# Altium PCB uCurrentRev5.PcbDoc
Units mil, origin at the board's own origin, x right, y up, seen from the top; angles counter-clockwise.
Board outline 1968.5 x 3110.24 mil, 2 copper layers (Top Layer, Bottom Layer); 31 components, 22 nets, 89 pads, 4 vias.
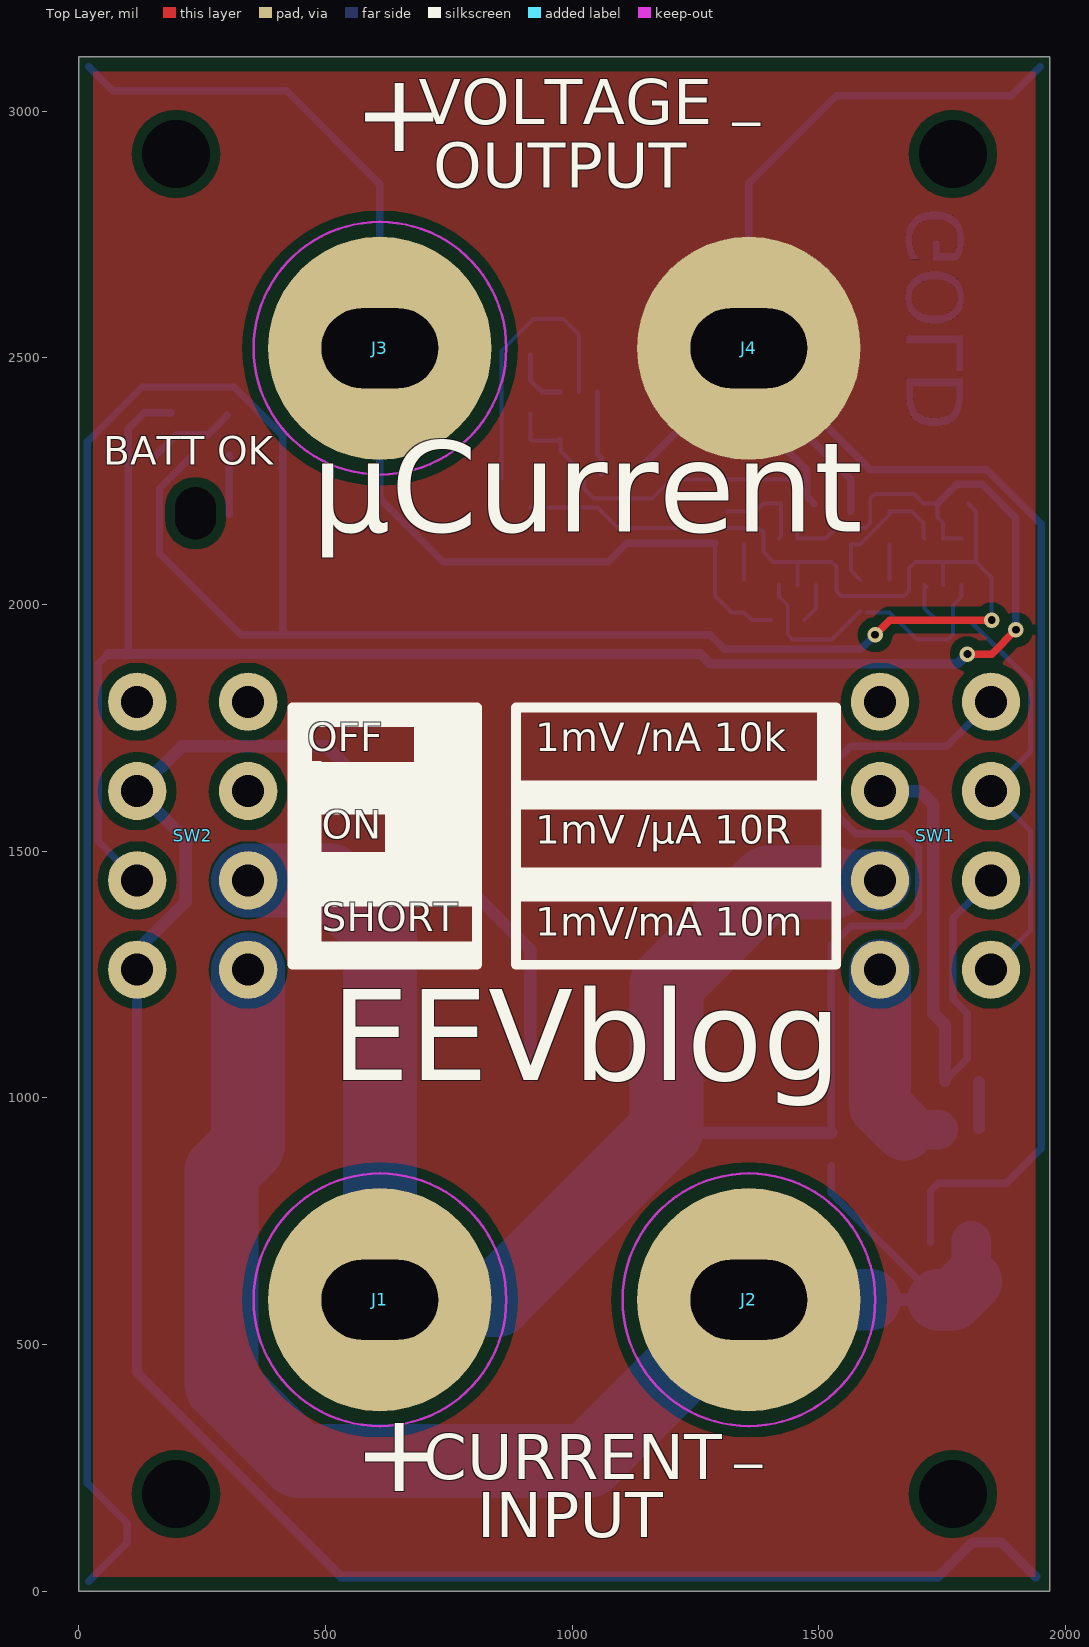
[diagram p0: Top Layer view]
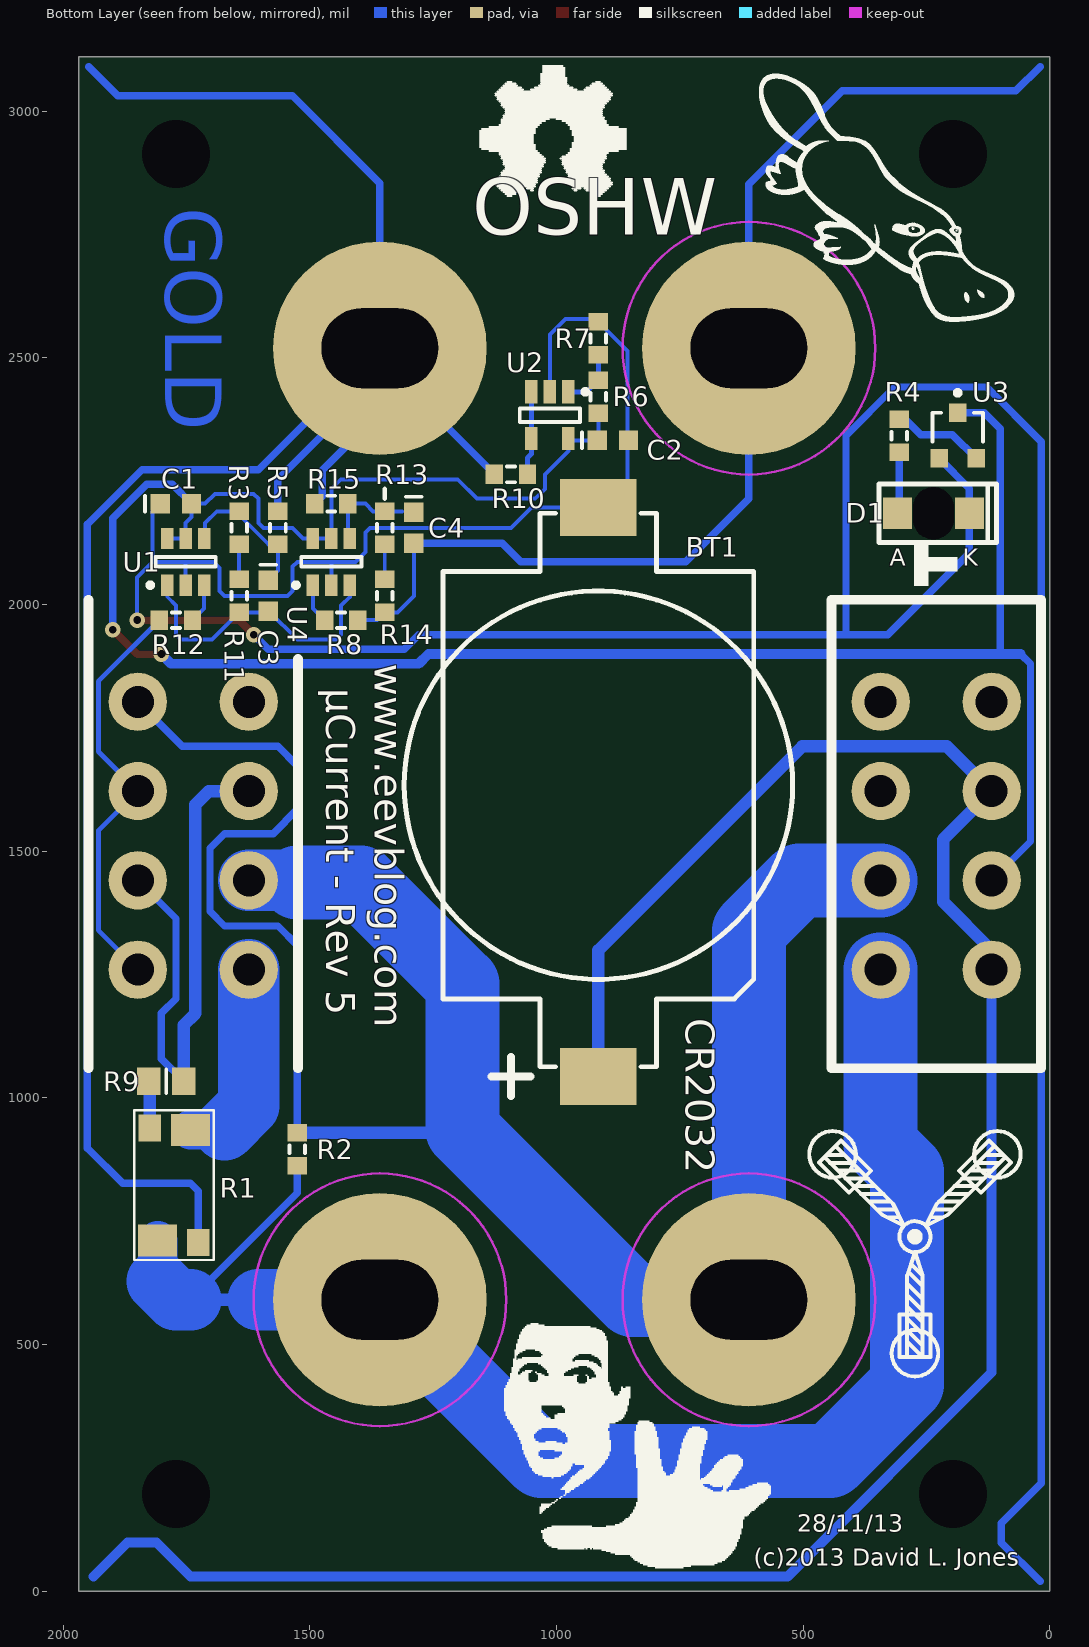
[diagram p1: Bottom Layer view, seen from below]

## Layer stack, top to bottom
Top Layer: signal copper 1.4
Dielectric: dielectric 12.6, FR-4, Dk 4.8
Bottom Layer: signal copper 1.4

## Board outline
0,0 1968.5,0 1968.5,3110.24 0,3110.24

## Design rules (kind name [scope] priority, off if disabled: settings)
Clearance Clearance_3 [InNamedPolygon('Top Layer-No Net')] p1: gap=20
Clearance Clearance_2 [InNamedPolygon('Top Layer-No Net')] p2: gap=10
Clearance Clearance_1 [InNamedPolygon('Top Layer-No Net')] p3: gap=20
Clearance [All] p4: gap=25
FabricationTestPointUsage TestPointUsage [All] p1: valid=0 allowmultiple=FALSE
FabricationTestpoint Testpoint [All] p1: side=3 testpointundercomponent=TRUE minsize=40 maxsize=100 preferedsize=60 minholesize=0 maxholesize=40 preferedholesize=32 testpointgrid=1 allowsidetop=TRUE allowsidebottom=TRUE usegrid=TRUE gridtolerance=0.01
HoleSize [All] p1: absolutevalues=TRUE maxlimit=196.85 minlimit=1 maxpercent=80.000 minpercent=20.000
PolygonConnect [All] p1: connectstyle=Direct reliefconductorwidth=10 reliefentries=4 polygonreliefangle="90 Angle"
RoutingVias [All] p1: holewidth=15.75 width=31.5 viastyle="Through Hole" minholewidth=15.75 minwidth=31.5 maxholewidth=15.75 maxwidth=31.5
SilkscreenOverComponentPads [All] p1: minsilkscreentomaskgap=10
SolderMaskExpansion [All] p1: expansion=2
Width [All] p1: maxlimit=150 minlimit=8 preferedwidth=15 minimp=50.000000 maximp=50.000000 favimp=50.000000
24 further rules are at their usual default settings.

## Components (designator, comment, footprint, x,y, rotation, side; value= is the part's Value field where it differs from the comment)
BT1 "2032 3V Lithium battery" "2032 SMD Holder" 915.35,1043.31 r90 bottom
C1 "0u1 6V" CAPC1608N 1771.65,2204.72 r180 bottom
C2 "0u1 16V" CAPC1608N 885.83,2332.68 r180 bottom
C3 "10pF" CAPC1608N 1584.65,2017.72 r270 bottom
C4 "10pF" CAPC1608N 1289.37,2155.51 r270 bottom
D1 "GREEN" 1206reverseLED 236.22,2185.04 r0 bottom
J1 "4mm Socket" PIN1 610.24,590.55 r0 top locked
J2 "4mm Socket" PIN1 1358.27,590.55 r0 top locked
J3 "4mm Socket" PIN1 610.24,2519.68 r0 top locked
J4 "4mm Socket" PIN1 1358.27,2519.68 r0 top locked
R1 "0R01 0.1%" 2512shuntresistor 1742.13,935.04 r0 bottom
R2 "10K 0.05%" RESC1608N 1525.59,895.67 r270 bottom
R3 "6K8 0.05%" RESC1608N 1643.7,2155.51 r270 bottom
R4 "270R" RESC1608N 305.12,2342.52 r90 bottom
R5 "1K 0.05%" RESC1608N 1564.96,2155.51 r90 bottom
R6 "100K 1%" RESC1608N 915.35,2421.26 r270 bottom
R7 "100K 1%" RESC1608N 915.35,2539.37 r90 bottom
R8 "270R" RESC1608N 1437.01,1968.5 r0 bottom
R9 "10R 0.05%" RESC2012N 1791.34,1033.46 r0 bottom
R10 "270R" RESC1608N 1092.52,2263.78 r180 bottom
R11 "2K2 0.05%" RESC1608N 1643.7,2017.72 r270 bottom
R12 "270R" RESC1608N 1771.65,1968.5 r180 bottom
R13 "6K8 0.05%" RESC1608N 1348.43,2155.51 r270 bottom
R14 "2K2 0.05%" RESC1608N 1348.43,2017.72 r270 bottom
R15 "1K 0.05%" RESC1608N 1456.69,2204.72 r0 bottom
SW1 "SW-DT3T-NOCOMMON" SW_L203011MS02 1624.02,1259.84 r0 top locked
SW2 "SW-DT3T-NOCOMMON" SW_L203011MS02 118.11,1259.84 r0 top locked
U1 "MAX4239AUT" SOT-23-CH6_N 1751.97,2086.61 r90 bottom
U2 "LMV321AS5X" SOT23-5AL 1013.78,2383.86 r270 bottom
U3 "TPS3809L30DBVR" SOT23 187.01,2342.52 r180 bottom
U4 "MAX4239AUT" SOT-23-CH6_N 1456.69,2086.61 r90 bottom

## Footprints (in the part's own frame and the unit in brackets; to place one, negate y for a bottom-side part, rotate by r counter-clockwise, add the part's x,y. Pads: shape width x height; smd on the part's side, far side on the other; paste and mask are expansions set on the pad)
1206reverseLED [mm] "1206 Reverse LED SMD"
  round 0 hole 2.1 slot 2.7 at 90 deg unplated paste+2.032 mask+1.05: 0(0,0)
  rect 1.5x1.6 smd: 1(1.85,0) 2(-1.85,0)
  silkscreen extent -3.25,-1.5 2.8,1.5, body extent -1.6,-0.6 1.5,0.6, height 0.67
"2032 SMD Holder" [mil]
  rect 115x155 smd: 1(0,0) 2(1153.54,0)
  silkscreen extent -39,-394 1142,394
2512shuntresistor [mm]
  rect 2x1.65 smd mask+0.051: 1(0,0) 2(1.7,5.7)
  rect 1.15x1.4 smd mask+0.051: 3(2.1,-0.1) 4(-0.4,5.8)
  silkscreen extent -1.2,-1 2.9,6.7
CAPC1608N [mm] "Chip Capacitor, Body 1.6x0.8mm, IPC Medium Density"
  rect 1x1 smd: 1(-0.8,0) 2(0.8,0)
  silkscreen extent -1.6,-0.4 -1.6,0.4, body extent -0.87,-0.48 0.87,0.48, height 0.85
PIN1 [mm] "Connector; Plug"
  round 11.5 / inner round 10 / far side round 11 hole 4.1 slot 6 at 0 deg mask+0: 1(0,0)
RESC1608N [mm] "Chip Resistor, Body 1.6x0.8mm, IPC Medium Density"
  rect 0.9x1 smd: 1(-0.85,0) 2(0.85,0)
  silkscreen extent -0.2,-0.4 0.2,0.4, body extent -0.85,-0.48 0.85,0.48, height 0.6
RESC2012N [mm] "Chip Resistor, Body 2.0x1.3mm, IPC Medium Density"
  rect 1.2x1.4 smd: 1(-0.9,0) 2(0.9,0)
  silkscreen extent 0,-0.6 0,0.6, body extent -1.07,-0.7 1.07,0.7, height 0.65
SOT23 [mm] "SOT-23; 3 Leads; Body 3.1 x 2.5 mm, inc. leads (LxW max), Alternate Lead Configuration"
  rect 0.9x0.95 smd: 1(0,1.175) 2(0.95,-1.175) 3(-0.95,-1.175)
  silkscreen extent -1.3,-0.3 1.3,2.32
SOT23-5AL [mm] "SOT23, 5-Leads, Body 2.9x1.6mm, Pitch 0.95mm, Lead Span 2.8mm, IPC High Density"
  rect 1.2x0.65 smd: 1(-1.2,0.95) 2(-1.2,0) 3(-1.2,-0.95) 4(1.2,-0.95) 5(1.2,0.95)
  silkscreen extent -1.32,-1.55 0.35,1.95, body extent -0.9,-1.55 0.9,1.55, height 1.45
SOT-23-CH6_N [mm] "SOT23, 6-Leads, Body 2.9x1.6mm, Pitch 0.95mm, Lead Span 2.7mm, IPC Medium Density"
  rect 1.1x0.65 smd: 1(-1.2,0.95) 2(-1.2,0) 3(-1.2,-0.95) 4(1.2,-0.95) 5(1.2,0) 6(1.2,0.95)
  silkscreen extent -1.32,-1.55 0.25,1.95, body extent -0.9,-1.55 0.9,1.55, height 1.45
SW_L203011MS02 [mm] "C&K L203011MS02 PCB Slide Switch"
  round 3 hole 1.65: 1A(0,0) 1B(5.715,0) 2A(0,4.597) 2B(5.715,4.597) 3A(0,9.195) 3B(5.715,9.195) 4A(0,13.792) 4B(5.715,13.792)

## Part data
BT1: library part D-302-0000, "Lithium Battery Holder for CR2032 3V Cell"
C1 C2 C3 C4: library part D-101-0085, "Capacitor, Ceramic, 4.7uF 10% 16V 0805 (2012) X7R"
D1: library part D-153-0003, "LED, Red 0805 (2012) HSMH-C170"
J1 J2 J3 J4: library part Socket, "Socket"
R1: library part 1206currentShunt, "1206 current shunt"
R2 R3 R4 R5 R6 R7 R8 R10 R11 R12 R13 R14 R15: library part D-100-0004, "Resistor, 75R 1% 0805 (2012)"
R9: library part RES, "Resistor, 75R 1% 0805 (2012)"
U1 U4: library part MCP6273T-E/CH, "170 uA, 2 MHz Rail-to-Rail Operational Amplifier, 6-Pin SOT-23, Extended Temperature, Tape and Reel"
U2: library part LMV321, "2.7V GP Opamp"
U3: library part VoltageSupervisor

## Free pads (board coordinates)
  round 0 hole 137.8 unplated mask+78.74: 1(196.85,196.85) 2(1771.65,196.85) 3(196.85,2913.39) 4(1771.65,2913.39)

## Via types
v1: diameter 31.5, hole 15.75, Top Layer to Bottom Layer, tented both sides, 4 vias

## Nets (pads, with @x,y where several pads share a name; then routed paths per layer and width w, separated by ;. In a path a pad name is that pad's centre, name@x,y a point inside that pad or via, vN(x,y) a via of type N, cw(c..) or ccw(c..) an arc to the next point about the centre after c; other vN are vias at no path point)
+IN: J1.1 R2.1 SW1.2A SW1.4B SW2.2B | length 4314.3
  Bottom Layer w15: R2.1 1525.59,1309.06 1564.96,1348.43 1673.23,1348.43 1702.76,1377.95 1702.76,1505.91 1673.23,1535.43 1574.8,1535.43 1525.59,1584.65 1525.59,1673.23 1564.96,1712.6 1758.77,1712.6 SW1.4B
  Bottom Layer w25: 1196.85,929.13 R2.1
  Bottom Layer w125: 1525.59,1437.01 1529.43,1440.84 SW1.2A
  Bottom Layer w150: SW2.2B 507.98,1440.84 610.24,1338.58 J1.1 846.46,590.55 1190.94,935.04 1190.94,1230.32 1397.64,1437.01 1525.59,1437.01
+V: C1.2 C2.1 R6.2 SW2.2A U1.5 U1.6 U2.5 U3.1 U4.5 U4.6 | length 4637.2
  Top Layer w15: v1(1801.18,1899.61) 1850.39,1899.61 v1(1899.61,1948.82)
  Bottom Layer w8: C2.1@915.35,2334.65 R6.2 ; C2.1 972.44,2332.68 U2.5 976.38,2311.02 1023.62,2263.78 1023.62,2234.25 1043.31,2214.57 1161.42,2214.57 1200.79,2253.94 1437.01,2253.94 1456.69,2234.25 U4.5 U4.6 1513.78,2133.86 1535.43,2155.51 1594.49,2155.51 1604.33,2165.35 1604.33,2214.57 1614.17,2224.41 1692.91,2224.41 1712.6,2204.72 C1.2 1740.16,2177.17 1751.97,2165.35 U1.5 U1.6
  Bottom Layer w15: 59.06,1899.61 39.37,1879.92 39.37,1519.58 SW2.2A ; 100.39,1899.61 100.39,2356.3 132.87,2388.78 U3.1 ; C1.2 1779.53,2244.09 1830.71,2244.09 1899.61,2175.2 v1(1899.61,1948.82)
  Bottom Layer w20: 59.06,1899.61 1259.84,1899.61 1279.53,1879.92 1781.5,1879.92 v1(1801.18,1899.61)
-IN: J2.1 R1.2 R2.2 SW2.1B | length 3189.8
  Bottom Layer w15: R2.2 1525.59,807.09 1742.13,590.55
  Bottom Layer w25: 1604.33,590.55 1742.13,590.55
  Bottom Layer w80: J2.1@1210.63,590.55 J2.1 ; 1809.06,627.95 R1.2
  Bottom Layer w125: J2.1 1604.33,590.55 ; 1742.13,590.55 1771.65,590.55 1809.06,627.95
  Bottom Layer w150: SW2.1B 343.11,904.13 289.37,850.39 289.37,419.29 445.34,263.32 1031.04,263.32 J2.1
-V: BT1.2 C1.1 C2.2 D1.2 R7.2 U1.2 U2.2 U3.3 U4.2 | length 7279.3
  Top Layer w15: v1(1614.17,1938.98) 1643.7,1968.5 v1(1850.39,1968.5)
  Bottom Layer w8: 856.3,2255.91 856.3,2513.78 R7.2 921.26,2578.74 982.28,2578.74 1013.78,2547.24 U2.2 ; BT1.2 1051.18,2196.85 1092.52,2155.51 1377.95,2155.51 1387.8,2145.67 1387.8,2106.3 1407.48,2086.61 1525.59,2086.61 1535.43,2076.77 1535.43,2027.56 1545.28,2017.72 1673.23,2017.72 1683.07,2027.56 1683.07,2073.71 1695.97,2086.61 1751.97,2086.61 ; U4.2 1456.69,2086.61 ; U1.2 1751.97,2086.61 ; C1.1 1818.9,2188.98 1818.9,2086.61 ; v1(1850.39,1968.5) 1850.39,2055.12 1818.9,2086.61 ; 1751.97,2086.61 1818.9,2086.61
  Bottom Layer w15: 19.68,19.69 98.43,98.43 98.43,137.8 17.37,218.85 17.37,2330.36 127.95,2440.94 314.96,2440.94 413.39,2342.52 413.39,1938.98 ; U3.3 163.39,2235.24 D1.2 163.39,2104.33 328.74,1938.98 413.39,1938.98 ; v1(1614.17,1938.98) 1584.65,1909.45 1309.06,1909.45 1279.53,1938.98 413.39,1938.98
B+: BT1.1 SW2.1A SW2.3A | length 4571.6
  Bottom Layer w20: SW2.1A 118.11,442.91 531.5,29.53 1742.13,29.53 1811.02,98.43 1870.08,98.43 1938.98,29.53
  Bottom Layer w25: SW2.1A 118.11,1299.21 216.54,1397.64 216.54,1523.42 SW2.3A 208.87,1712.6 501.97,1712.6 915.35,1299.21 BT1.1
NetC3_1: C3.1 R3.1 R5.1 U1.4 | length 302.5
  Bottom Layer w8: C3.1 1564.96,2068.9 R5.1 1583.65,2122.05 1643.7,2182.1 R3.1 1688.98,2188.98 1712.6,2165.35 1712.6,2135.83 U1.4
NetC3_2: C3.2 R11.2 U1.1 U4.3 | length 592.9
  Bottom Layer w8: U4.3 1419.29,2015.75 1437.01,1998.03 1437.01,1938.98 1446.85,1929.13 1525.59,1929.13 1582.68,1986.22 C3.2 ; C3.2@1596.46,1984.25 R11.2 1698.82,1929.13 1761.81,1929.13 1771.65,1938.98 1771.65,1998.03 1789.37,2015.75 U1.1
NetC4_1: C4.1 R13.1 R15.1 U4.4 | length 189.3
  Bottom Layer w8: 1312.99,2188.98 R13.1 1372.05,2188.98 1387.8,2204.72 R15.1 1423.23,2137.8 U4.4
NetC4_2: C4.2 J3.1 R8.1 R14.2 | length 2315.3
  Bottom Layer w8: C4.2 1289.37,2017.72 1322.83,1984.25 R14.2 1364.17,1968.5 R8.1
  Bottom Layer w15: 19.68,3090.55 68.9,3041.34 420.96,3041.34 610.24,2852.06 J3.1 610.24,2214.57 738.19,2086.61 1072.83,2086.61 1110.24,2124.02 C4.2
NetD1_1: D1.1 R4.1 | length 120.1
  Bottom Layer w15: D1.1@305.12,2183.07 R4.1@305.12,2303.15
NetR1_1: R1.1 SW1.1A | length 414.1
  Bottom Layer w80: 1673.23,935.04 R1.1
  Bottom Layer w125: SW1.1A 1624.02,984.25 1673.23,935.04
NetR1_3: R1.3 R9.2 | length 92.5
  Bottom Layer w25: R1.3 R9.2@1824.8,1031.5
NetR3_2: R3.2 R11.1 | length 70.9
  Bottom Layer w8: R11.1 R3.2
NetR4_2: R4.2 U3.2 | length 187.9
  Bottom Layer w15: U3.2 197.83,2344.49 261.81,2344.49 R4.2@301.18,2383.86
NetR6_1: R6.1 R7.1 U2.1 | length 122
  Bottom Layer w10: R7.1 R6.1 938.98,2431.1 U2.1
NetR8_2: R8.2 U4.1 | length 80.7
  Bottom Layer w8: R8.2 1494.09,1992.13 U4.1
NetR9_1: R9.1 SW1.2B SW1.3A | length 1160
  Bottom Layer w15: R9.1 1755.91,1034.29 1801.18,1079.56 1801.18,1171.26 1771.65,1200.79 1771.65,1363.48 SW1.2B
  Bottom Layer w25: SW1.3A 1704.93,1621.84 1732.28,1594.49 1732.28,1171.26 1755.91,1147.64 R9.1@1755.91,1034.29
NetR10_2: R10.2 U2.3 U2.4 | length 170.6
  Bottom Layer w10: U2.3 U2.4 1051.18,2305.12 1059.06,2297.24 R10.2
NetR12_1: R12.1 SW1.1B SW1.3B | length 859.6
  Bottom Layer w10: R12.1 1929.13,1844.49 1929.13,1701.96 SW1.3B 1929.13,1541.72 1929.13,1339.96 SW1.1B
NetR12_2: R12.2 U1.3 | length 86.2
  Bottom Layer w8: U1.3@1718.5,2035.43 U1.3 1714.57,1992.13 R12.2
NetR13_2: R13.2 R14.1 | length 70.9
  Bottom Layer w8: R14.1 R13.2
VGND: J4.1 R1.4 R5.2 R10.1 R15.2 | length 5125.8
  Top Layer w15: J4.1@1190.95,2519.68 J4.1 ; J4.1@1358.27,2391.73 J4.1 ; J4.1@1358.27,2657.48 J4.1 ; J4.1@1545.28,2529.53 1535.43,2519.68 J4.1
  Bottom Layer w15: R10.1 J4.1@1358.27,2496.06 ; R15.2 1475.19,2219.69 1475.19,2272.44 1358.27,2389.36 J4.1@1358.27,2460.63 ; R5.2 1564.96,2253.94 J4.1@1358.27,2460.63 ; R1.4 1726.38,811.02 1742.13,826.77 1879.92,826.77 1951.13,897.98 1951.13,2163.04 1840.55,2273.62 1604.33,2273.62 1377.95,2500 1362.2,2500 J4.1@1358.27,2496.06 ; 1948.82,3090.55 1889.76,3031.5 1535.43,3031.5 1358.27,2854.33 J4.1 ; J4.1@1358.27,2460.63 J4.1@1358.27,2496.06 ; J4.1@1358.27,2460.63 J4.1 ; J4.1@1358.27,2496.06 J4.1
pads on no net: D1.0 SW1.4A SW2.3B SW2.4A SW2.4B

## Polygon pours and split planes (outlines as drawn)
VGND on Top Layer "Top Layer-No Net" (solid, remove dead copper, pour order 1000): 29.53,29.53 1938.98,29.53 1938.98,3079.81 29.53,3079.81

## Keep-outs
Keep-Out Layer:
  circle w5: c610.24,2519.68 r256.09
  circle w5: c1358.27,590.55 r256.09
  circle w5: c610.24,590.55 r256.09

## Other copper
Bottom Layer:
  text "GOLD" at 1830.71,2805.12 h196.85 r90

## Silkscreen, mask and mechanical layers (free items; w line width, h text height)
Top Overlay:
  rectangle: 885.83,1584.65 1535.43,1643.7
  rectangle: 885.83,1397.64 1535.43,1466.54
  rectangle: 1505.91,1456.69 1535.43,1614.17
  rectangle: 679.13,1387.8 807.09,1791.34
  rectangle: 433.07,1269.68 807.09,1309.06
  rectangle: 433.07,1309.06 492.13,1683.07
  rectangle: 472.44,1584.65 688.98,1673.23
  rectangle: 620.08,1387.8 688.98,1594.49
  rectangle: 482.28,1387.8 639.76,1486.22
  rectangle: 433.07,1751.97 688.98,1781.5
  rectangle: 433.07,1673.23 472.44,1771.65
  rectangle: 1496.06,1614.17 1535.43,1791.34
  lines w15: 472.44,1673.23 688.98,1673.23 ; 485.04,1309.06 807.09,1309.06
  lines w20: 472.44,1584.65 688.98,1584.65 ; 433.07,1269.68 433.07,1791.34 807.09,1791.34 807.09,1269.68 433.07,1269.68 ; 885.83,1269.68 885.83,1791.34 1535.43,1791.34 1535.43,1269.68 885.83,1269.68
  lines w25: 462.6,1486.22 698.82,1486.22
  text "VOLTAGE" at 688.98,2942.91 h157.48
  text "+" at 557.09,2866.14 h275.59
  text "-" at 1312.99,2866.14 h275.59
  text "OUTPUT" at 718.5,2814.96 h157.48
  text "BATT OK" at 49.21,2263.78 h98.43
  text "µCurrent" at 472.44,2086.61 h314.96
  text "OFF" at 462.6,1683.07 h98.43
  text "1mV /nA 10k" at 925.2,1683.07 h98.43
  text "ON" at 492.13,1505.91 h98.43
  text "1mV /µA 10R" at 925.2,1496.06 h98.43
  text "SHORT" at 492.13,1318.9 h98.43
  text "1mV/mA 10m" at 925.2,1309.06 h98.43
  text "EEVblog" at 511.81,974.41 h314.96
  text "CURRENT" at 698.82,196.85 h157.48
  text "+" at 557.09,149.61 h275.59
  text "-" at 1316.93,145.67 h275.59
  text "INPUT" at 807.09,78.74 h157.48
Bottom Overlay:
  drawing of 2041 lines, arcs and shapes, not listed
  text "OSHW" at 1171.26,2712.54 h196.85
  text "K" at 177.17,2066.93 h59.06
  text "A" at 324.8,2066.93 h59.06
  text "www.eevblog.com" at 1387.8,1879.92 h100 r90
  text "µCurrent - Rev 5" at 1486.22,1830.71 h100 r90
  text "CR2032" at 757.87,1161.42 h100 r90
  text "28/11/13" at 511.81,108.27 h60
  text "(c)2013 David L. Jones" at 600.39,39.37 h60
Top Solder:
  text "GOLD" at 718.5,1889.76 h236.22
Bottom Solder:
  region: 1840.55,2303.15 1840.55,2814.96 1692.91,2814.96 1692.91,2303.15
  lines w25: 1663.39,590.55 1683.07,590.55
Mechanical 1:
  the board outline again, w5